# Altium PCB UDEMY_ALI_ALCAN.PcbDoc (part 2 of 3)
Units mm, origin at the board's own origin, x right, y up, seen from the top; angles counter-clockwise.
Board outline 102 x 100 mm, 4 copper layers (Top Layer, GROUND, POWER, Bottom Layer), stack 1.369 mm thick; 127 components, 90 nets, 438 pads, 96 vias.
Unrouted connection lines stored in the file: 1.
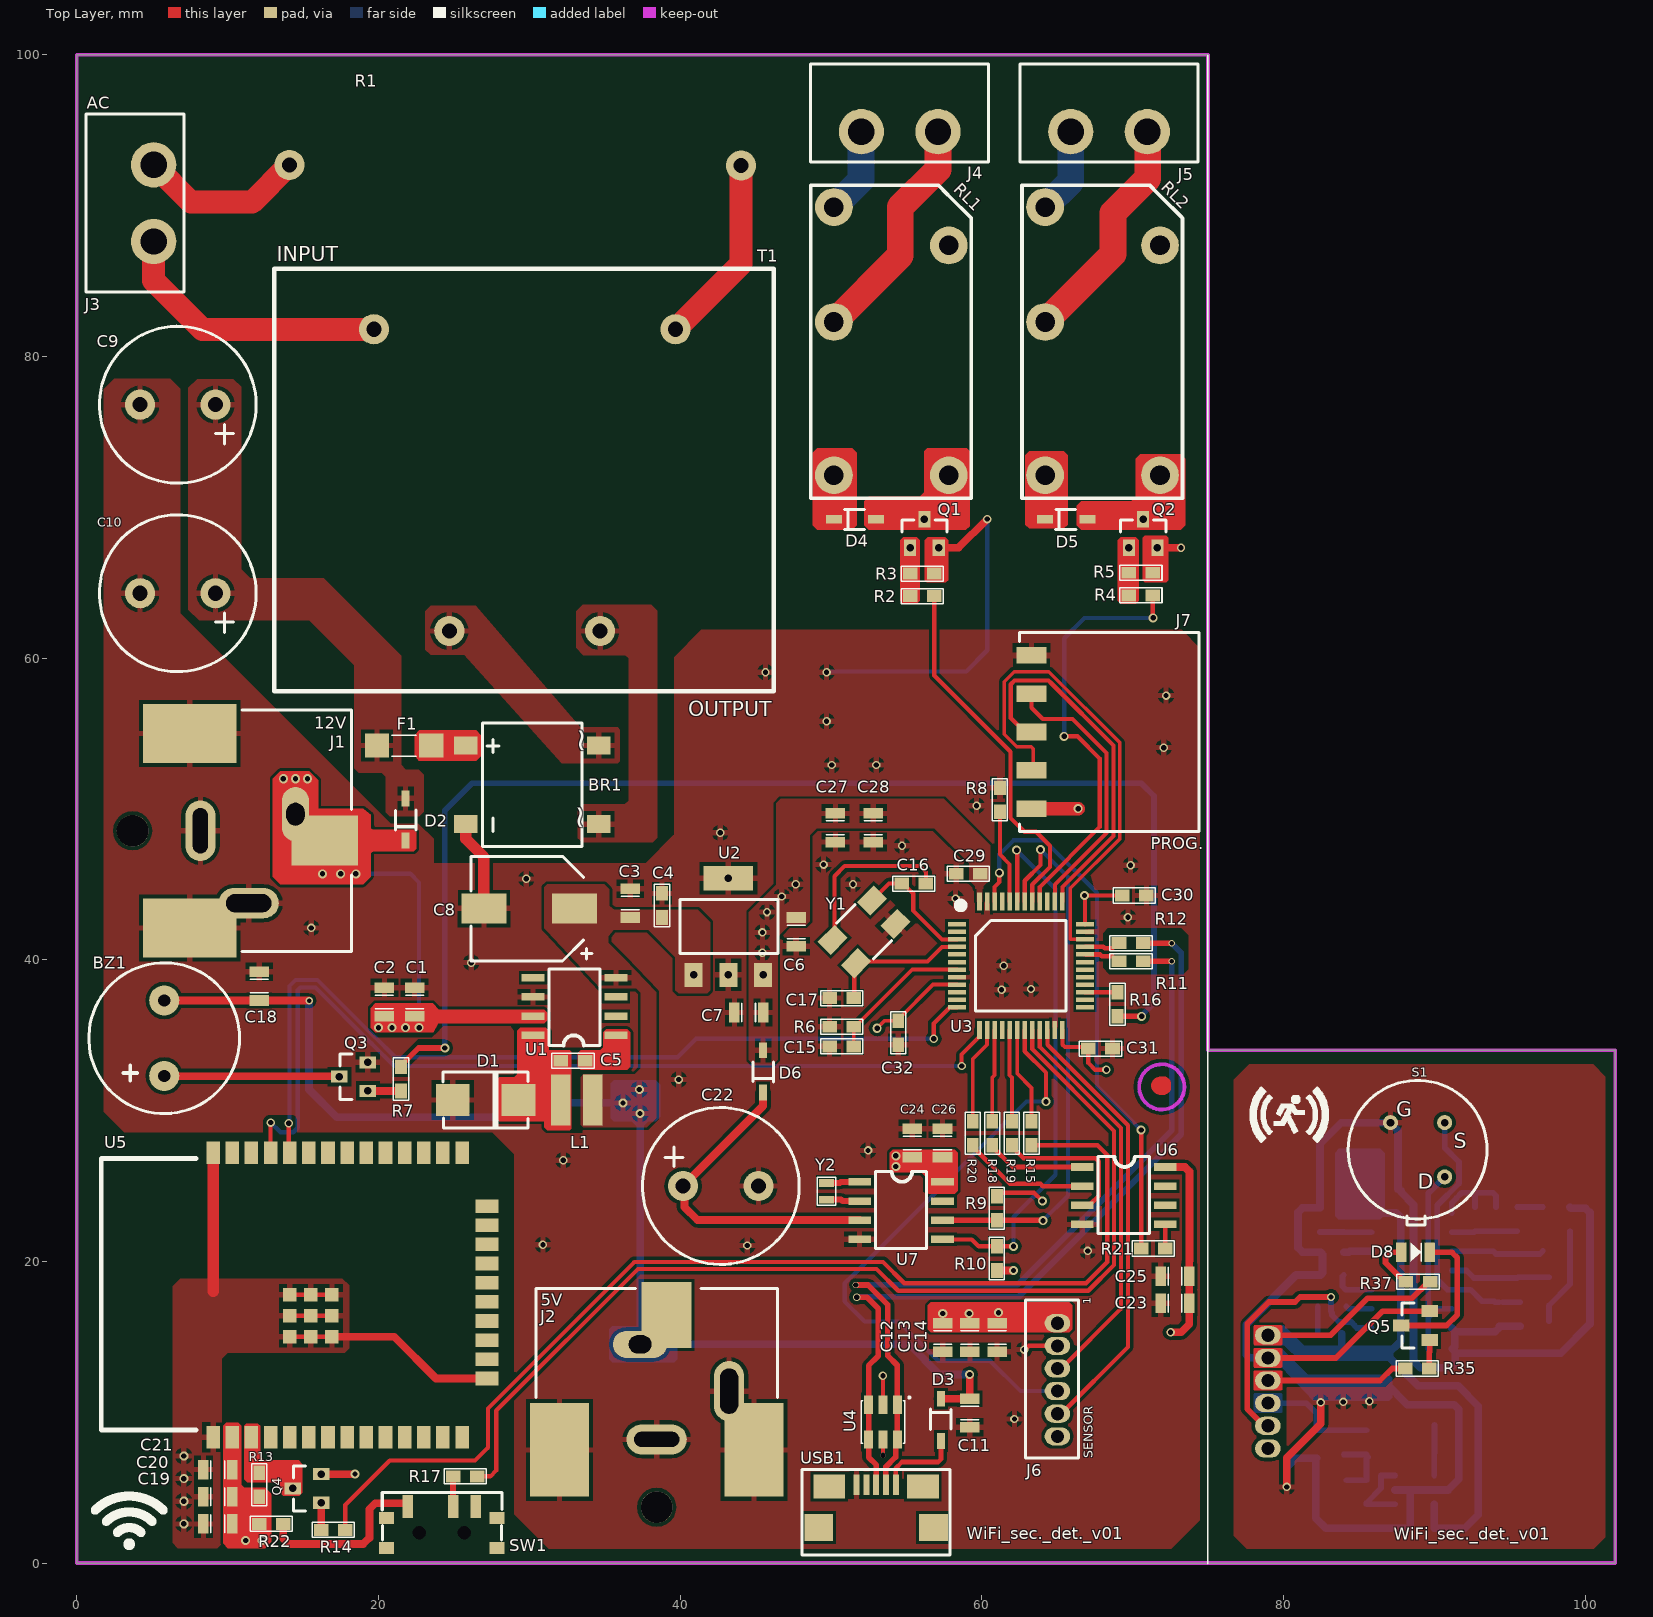
[diagram p0: Top Layer view]

## Part data (continued)
R6 R7 R8 R11 R12 R14 R15 R16 R17 R18 R19 R20 R21 R22 R37: library part "RES 100 OHM 0603", "Res Thick Film 0603 100 Ohm 5% 1/10W ±100ppm/°C Molded SMD SMD Paper T/R", Case Code (Metric)=1608, Case Code (Imperial)=0603, Manufacturer=Yageo, Max Operating Temperature=155°C, Max Power Dissipation=100mW, Min Operating Temperature=-55°C, Resistance Tolerance=5%, Resistor Type="Thick Film", Supplier Part Number=311-100GRCT-ND, Temperature Coefficient=100ppm/°C, Voltage Rating=50V, Case/Package=0603, Category="Chip SMD Resistors", ComponentLink1Description=https://datasheet.ciiva.com/7746/443971-7746425.pdf?src-supplier=Element14, ComponentLink1URL=https://datasheet.ciiva.com/7746/443971-7746425.pdf?src-supplier=Element14, ComponentLink2Description=https://datasheet.ciiva.com/7746/443971-7746426.pdf?src-supplier=Element14, ComponentLink2URL=https://datasheet.ciiva.com/7746/443971-7746426.pdf?src-supplier=Element14, ComponentLink3Description=https://datasheet.ciiva.com/8883/pyu-rc0603-51-rohs-l-4-8883047.pdf?src-supplier=Avnet, ComponentLink3URL=https://datasheet.ciiva.com/8883/pyu-rc0603-51-rohs-l-4-8883047.pdf?src-supplier=Avnet, ComponentLink4Description=https://datasheet.ciiva.com/15189/getdatasheetpartid-325207-15189846.pdf?src-supplier=Verical, ComponentLink4URL=https://datasheet.ciiva.com/15189/getdatasheetpartid-325207-15189846.pdf?src-supplier=Verical, Construction=Rectangular, Contact Plating=Tin,Matte, Depth=0.8mm, Designed By=ALİ, Features="Moisture Resistant", Lead Free="Lead Free", Length=1.6mm, Manufacturer Part Number=RC0603JR-07100RL, Military Standard=Not, Number of Terminations=2, Packaging="Tape and Reel", Pins=2, Power Rating=100mW, Pricing="1=0,1, 10=0,014, 50=0,0088, 100=0,0073, 500=0,00486, 1000=0,00415 (USD)", Reach SVHC Compliant=Unknown, RoHS=Yes, RoHS Compliant=Yes, Series=RC, Stock=872002, Supplier=Digi-Key, Termination=SMD/SMT, Tolerance=5%, Voltage Rating (DC)=50V, Width=0.8mm
R9 R10: library part "RES 4K7 OHM 0603", "SMD Chip Resistor, 4.7 kOhm, ± 5%, 100 mW, 0603 [1608 Metric], Thick Film, General Purpose", Case Code (Metric)=1608, Case Code (Imperial)=0603, Manufacturer=Yageo, Max Operating Temperature=155°C, Max Power Dissipation=100mW, Min Operating Temperature=-55°C, Resistance Tolerance=5%, Resistor Type="Thick Film", Supplier Part Number=311-4.7KGRCT-ND, Temperature Coefficient=100ppm/°C, Voltage Rating=50V, Case/Package=0603, Category="Chip SMD Resistors", ComponentLink1Description=https://datasheet.ciiva.com/46412/443971-46412858.pdf?src-supplier=Element14, ComponentLink1URL=https://datasheet.ciiva.com/46412/443971-46412858.pdf?src-supplier=Element14, Construction=Rectangular, Depth=0.8mm, Designed By=ALİ, Features="Moisture Resistant", Lead Free="Lead Free", Length=1.6mm, Manufacturer Part Number=RC0603JR-074K7L, Military Standard=Not, Number of Terminations=2, Packaging="Tape and Reel", Pins=2, Power Rating=100mW, Pricing="1=0,1, 10=0,014, 50=0,0088, 100=0,0073, 500=0,00486, 1000=0,00415 (USD)", Reach SVHC Compliant=No, RoHS=Yes, RoHS Compliant=Yes, Series=RC, Stock=7008256, Supplier=Digi-Key, Termination=SMD/SMT, Tolerance=5%, Voltage Rating (AC)=50V, Voltage Rating (DC)=50V, Width=0.8mm
R23 R27: library part "RES 560K OHM 0603", "SMD Chip Resistor, 560 kOhm, ± 5%, 100 mW, 0603 [1608 Metric], Thick Film, General Purpose", Case Code (Metric)=1608, Case Code (Imperial)=0603, Manufacturer=Yageo, Max Operating Temperature=155°C, Max Power Dissipation=100mW, Min Operating Temperature=-55°C, Package Quantity=1, Resistance Tolerance=5%, Resistor Type="Thick Film", Supplier Part Number=311-560KGRCT-ND, Temperature Coefficient=100ppm/°C, Voltage Rating=75V, Voltage Rating (AC)=50V, Case/Package=0603, Category="Chip SMD Resistors", ComponentLink1Description=https://datasheet.ciiva.com/2453/pyu-r-int-thick-7-2453056.pdf?src-supplier=Digi-Key, ComponentLink1URL=https://datasheet.ciiva.com/2453/pyu-r-int-thick-7-2453056.pdf?src-supplier=Digi-Key, ComponentLink2Description=https://datasheet.ciiva.com/2453/pyu-r-int-thick-7-2453057.pdf?src-supplier=Digi-Key, ComponentLink2URL=https://datasheet.ciiva.com/2453/pyu-r-int-thick-7-2453057.pdf?src-supplier=Digi-Key, ComponentLink3Description=https://datasheet.ciiva.com/2453/pyu-r-int-thick-7-2453055.pdf?src-supplier=Digi-Key, ComponentLink3URL=https://datasheet.ciiva.com/2453/pyu-r-int-thick-7-2453055.pdf?src-supplier=Digi-Key, Designed By=ALİ, Features="Moisture Resistant", Height=0.022inch, Lead Free="Lead Free", Length=0.063inch, Manufacturer Part Number=RC0603JR-07560KL, Number of Terminations=2, Packaging="Tape and Reel", Pins=2, Power Rating=100mW, Pricing="1=0,1, 10=0,014, 50=0,0088, 100=0,0073, 500=0,00486, 1000=0,00415 (USD)", Reach SVHC Compliant=Unknown, RoHS=Yes, RoHS Compliant=Yes, Series=RC, Stock=501281, Supplier=Digi-Key, Technology="THICK FILM", Termination=SMD/SMT, Tolerance=5%, Voltage Rating (DC)=50V, Weight=7.1E-05oz, Width=0.8mm, Working Voltage=75V
R29: library part "RES 43K OHM 0603", "Res Thick Film 0603 43K Ohm 5% 0.1W(1/10W) ±100ppm/°C Pad SMD T/R", Manufacturer=Yageo, Supplier Part Number=311-43KGRCT-ND, Category="Chip SMD Resistors", ComponentLink1Description=https://datasheet.ciiva.com/2453/pyu-r-int-thick-7-2453052.pdf?src-supplier=Digi-Key, ComponentLink1URL=https://datasheet.ciiva.com/2453/pyu-r-int-thick-7-2453052.pdf?src-supplier=Digi-Key, ComponentLink2Description=https://datasheet.ciiva.com/2453/pyu-r-int-thick-7-2453053.pdf?src-supplier=Digi-Key, ComponentLink2URL=https://datasheet.ciiva.com/2453/pyu-r-int-thick-7-2453053.pdf?src-supplier=Digi-Key, ComponentLink3Description=https://datasheet.ciiva.com/2453/pyu-r-int-thick-7-2453054.pdf?src-supplier=Digi-Key, ComponentLink3URL=https://datasheet.ciiva.com/2453/pyu-r-int-thick-7-2453054.pdf?src-supplier=Digi-Key, Designed By=ALİ, Manufacturer Part Number=RC0603JR-0743KL, Pricing="1=0,1, 10=0,014, 50=0,0088, 100=0,0073, 500=0,00486, 1000=0,00415 (USD)", RoHS=Yes, Stock=290453, Supplier=Digi-Key
R30 R31 R36: library part "RES 220K OHM 0603", "SMD Chip Resistor, 220 kOhm, ± 5%, 100 mW, 0603 [1608 Metric], Thick Film, General Purpose", Manufacturer=Yageo, Supplier Part Number=311-220KGRCT-ND, Voltage Rating (AC)=50V, Category="Chip SMD Resistors", ComponentLink1Description=https://datasheet.ciiva.com/2452/pyu-r-int-thick-7-2452923.pdf?src-supplier=Digi-Key, ComponentLink1URL=https://datasheet.ciiva.com/2452/pyu-r-int-thick-7-2452923.pdf?src-supplier=Digi-Key, ComponentLink2Description=https://datasheet.ciiva.com/2452/pyu-r-int-thick-7-2452924.pdf?src-supplier=Digi-Key, ComponentLink2URL=https://datasheet.ciiva.com/2452/pyu-r-int-thick-7-2452924.pdf?src-supplier=Digi-Key, ComponentLink3Description=https://datasheet.ciiva.com/2452/pyu-r-int-thick-7-2452925.pdf?src-supplier=Digi-Key, ComponentLink3URL=https://datasheet.ciiva.com/2452/pyu-r-int-thick-7-2452925.pdf?src-supplier=Digi-Key, Manufacturer Part Number=RC0603JR-07220KL, Pricing="1=0,1, 10=0,014, 50=0,0088, 100=0,0073, 500=0,00486, 1000=0,00415 (USD)", RoHS=Yes, Stock=938120, Supplier=Digi-Key
R32 R33: library part "RES 0 OHM 0603", "Zero Ohm Resistor, Jumper, 0603 [1608 Metric], Thick Film, 100 mW, 1 A, Surface Mount", Case Code (Metric)=1608, Case Code (Imperial)=0603, Manufacturer=Yageo, Max Operating Temperature=155°C, Max Power Dissipation=100mW, Min Operating Temperature=-55°C, Package Quantity=5000, Resistance=0R, Resistance Tolerance=5%, Resistor Type="Thick Film", Supplier Part Number=311-0.0GRCT-ND, Temperature Coefficient=200ppm/°C, Tolerance=1%, Voltage Rating=50V, Case/Package=0603, Category="Chip SMD Resistors", Construction=Rectangular, Contact Plating=Tin,Matte, Depth=0.8mm, Designed By=ALİ, Features="Moisture Resistant", Height=0.45mm, Lead Free="Lead Free", Length=1.6mm, Manufacturer Part Number=RC0603JR-070RL, Military Standard=Not, Number of Terminations=2, Packaging="Tape and Reel", Pins=2, Power Rating=100mW, Pricing="1=0,1, 10=0,016, 25=0,0112, 50=0,0086, 100=0,0063, 250=0,0048, 500=0,00386, 1000=0,00284 (USD)", Reach SVHC Compliant=Unknown, RoHS=Yes, RoHS Compliant=Yes, Series=RC, Stock=5412959, Supplier=Digi-Key, Technology="THICK FILM", Termination=SMD/SMT, Voltage Rating (DC)=50V, Width=0.8mm
RL1 RL2: "General Purpose Relay SPDT (1 Form C) 12VDC Coil Through Hole", Manufacturer=Panasonic, Supplier Part Number=255-3562-ND, Case/Package=ALQ112, Category="Power Relays", ComponentLink1Description=https://datasheet.ciiva.com/24388/307ds-61b20-en-lq-24388909.pdf?src-supplier=Onlinecomponents.com, ComponentLink1URL=https://datasheet.ciiva.com/24388/307ds-61b20-en-lq-24388909.pdf?src-supplier=Onlinecomponents.com, Designed By=ALİ, Manufacturer Part Number=ALQ112, Pricing="1=1,31, 10=1,228, 25=1,092, 50=1,0372, 100=0,9826, 250=0,87344, 500=0,81884, 1000=0,76426, 5000=0,73696 (USD)", RoHS=Yes, Stock=251, Supplier=Digi-Key
RT1: "Thermistor PTC 10K Ohm 1% 1206", Case Code (Imperial)=1206, Manufacturer="Vishay Dale", Max Operating Temperature=125°C, Max Power Dissipation=125mW, Min Operating Temperature=-55°C, Package Quantity=5000, Resistance Tolerance=1%, Supplier Part Number=541-3533-1-ND, Voltage=40V, Case/Package=1206, Category=Thermistors, ComponentLink1Description=https://datasheet.ciiva.com/2852/tfpt-2852076.pdf?src-supplier=Digi-Key, ComponentLink1URL=https://datasheet.ciiva.com/2852/tfpt-2852076.pdf?src-supplier=Digi-Key, Designed By=ALİ, Height=0.55mm, Lead Free="Lead Free", Length=3.2mm, Manufacturer Part Number=TFPT1206L1002FM, Mounting Technology="Surface Mount", Packaging="Tape and Reel", Power Rating=125mW, Pricing="1=1,3, 10=0,973, 25=0,778, 100=0,7133, 500=0,59978, 1000=0,53495 (USD)", RoHS=Yes, RoHS Compliant=Yes, Series=TFPT, Stock=168, Supplier=Digi-Key, Termination=SMD/SMT, Tolerance=1%, Width=1.6mm
S1: "SENSOR PYRO DETECTOR DUAL MOTION", Case/Package=LHI, Max Supply Voltage=12, Min Supply Voltage=2, Supplier Part Number=1601-LHI878/3902-ND, Designed By=ALİ, Supplier 1=Digi-Key, Type="Pyro Detector"
SW1: "Slide Switch, SPDT, 0.025A, 24V, SMD", Manufacturer=E-Switch, Max Operating Temperature=70°C, Min Operating Temperature=-20°C, Operating Force=150gf, Supplier Part Number=EG5720CT-ND, Voltage Rating (DC)=24V, Actuator Length=1.4mm, Actuator Type=Standard, ComponentLink1Description=https://media.digikey.com/pdf/Data%20Sheets/E-Switch%20PDFs/EG1215_Series_Ds.pdf?src-supplier=Digi-Key, ComponentLink1URL=https://media.digikey.com/pdf/Data%20Sheets/E-Switch%20PDFs/EG1215_Series_Ds.pdf?src-supplier=Digi-Key, ComponentLink2Description=http://www.farnell.com/datasheets/2645007.pdf?src-supplier=Farnell, ComponentLink2URL=http://www.farnell.com/datasheets/2645007.pdf?src-supplier=Farnell, Designed By=ALİ, Electrical Life=10000Cycles, Manufacturer Part Number=EG1215AA, Mechanical Life=10000Cycles, Mounting Technology="Surface Mount", Packaging="Cut Tape", Pricing="1=0,99, 10=0,951, 25=0,8884, 100=0,7715, 250=0,702, 500=0,6508, 1000=0,60327 (USD)", RoHS=Yes, RoHS Compliant=Yes, Series=EG, Stock=8007, Supplier=Digi-Key, Switch Function=On-On, Switch Travel=1.5mm, Termination="Gull Wing", Throw Configuration=SPDT
T1: "230-12 Transformer 1VA", Manufacturer="Zettler Magnetics", Operating Frequency=50-60Hz, Primary Voltage=230V, Rated Power=1VA, Secondary Voltage=12V, Supplier Part Number=2469-BV302S12010-ZU, Designed By=ALİ, Manufacturer Part Number=BV302S12010-ZU, RoHS=No, Supplier 1=Digi-Key
U1: "SIMPLE SWITCHER® 6.5V to 40V, 1A Low Component Count Step-Down Regulator 8-SOIC -40 to 125", Case/Package="SOIC N", Manufacturer="TI National Semiconductor", Max Operating Temperature=125°C, Max Output current=1A, Max Supply Voltage=40V, Min Operating Temperature=-40°C, Min Input Voltage=8V, Output Voltage=12V, Package Quantity=2500, Quiescent Current=2.5mA, Supplier Part Number=296-35410-1-ND, Switching Frequency=260kHz, Category="Voltage Regulators - Switching", ComponentLink1Description=https://datasheet.ciiva.com/41457/001013881-da-01-en-ic-reg-buck-lm2675mx-12-nopb-soic-8-tid-41457896.pdf?src-supplier=Conrad, ComponentLink1URL=https://datasheet.ciiva.com/41457/001013881-da-01-en-ic-reg-buck-lm2675mx-12-nopb-soic-8-tid-41457896.pdf?src-supplier=Conrad, ComponentLink2Description=https://datasheet.ciiva.com/3220/lm2675-3220840.pdf?src-supplier=Avnet, ComponentLink2URL=https://datasheet.ciiva.com/3220/lm2675-3220840.pdf?src-supplier=Avnet, Designed By=ALİ, Efficiency=94%, Lead Free="Lead Free", Manufacturer Part Number=LM2675MX-12/NOPB, Mounting Technology="Surface Mount", Number of Outputs=1, Operating Supply Voltage=40V, Output Current=1A, Output Type=Fixed, Packaging="Tape and Reel", Pins=8, Pricing="1=4,71, 10=4,231, 25=3,9996, 100=3,4663, 250=3,28856, 500=2,95082, 1000=2,48864 (USD)", Radiation Hardening=No, RoHS=Yes, RoHS Compliant=Yes, Series=LM2675, Supplier=Digi-Key
U2: "AP7361 Series 3.3 V 1 A Low SMT Dropout Fixed-Mode Regulator - SOT-223", Case/Package=SOT-223, Dropout Voltage=500mV, Manufacturer=Diodes, Max Operating Temperature=85°C, Max Output current=1A, Max Power Dissipation=1.1W, Max Supply Voltage=6V, Min Current Limit=1.1A, Min Operating Temperature=-40°C, Min Input Voltage=2.2V, Output Voltage=3.3V, Package Quantity=1, Power Dissipation=1.1kW, Power Supply Rejection Ratio (PSRR)=65dB, Quiescent Current=70uA, Reference Voltage=800mV, Supplier Part Number=AP7361-33E-13DICT-ND, Accuracy=1%, Category="Voltage Regulators - Linear", ComponentLink1Description=https://datasheet.ciiva.com/26926/getdatasheetpartid-670786-26926141.pdf?src-supplier=Verical, ComponentLink1URL=https://datasheet.ciiva.com/26926/getdatasheetpartid-670786-26926141.pdf?src-supplier=Verical, ComponentLink2Description=https://datasheet.ciiva.com/25651/ap7361-25651049.pdf?src-supplier=Digi-Key, ComponentLink2URL=https://datasheet.ciiva.com/25651/ap7361-25651049.pdf?src-supplier=Digi-Key, Contact Plating=Tin,Matte, Designed By=ALİ, Lead Free="Lead Free", Manufacturer Part Number=AP7361-33E-13, Mounting Technology="Surface Mount", Number of Outputs=1, Number of Regulators=1, Output Current=1A, Output Type=Fixed, Packaging="Tape and Reel", Pins=4, Polarity=Positive, Pricing="1=0,51, 10=0,414, 25=0,3788, 100=0,2818, 250=0,2554, 500=0,21138, 1000=0,15853 (USD)", Radiation Hardening=No, Reach SVHC Compliant=Yes, RoHS=Yes, RoHS Compliant=Yes, Series=-, Stock=144913, Supplier=Digi-Key, Weight=0.000282oz
U3: "MCU 32-bit STM32F ARM Cortex M3 RISC 32KB Flash 2.5V/3.3V 48-Pin LQFP Tray", Case/Package=LQFP, Clock Frequency=72MHz, Manufacturer=STMicroelectronics, Max Operating Temperature=85°C, Max Supply Voltage=3.6V, Min Operating Temperature=-40°C, Min Supply Voltage=2V, Package Quantity=1500, Supplier Part Number=497-11515-ND, Category=Microcontrollers, ComponentLink1Description=https://datasheet.ciiva.com/15122/getdatasheetpartid-69879-15122075.pdf?src-supplier=Verical, ComponentLink1URL=https://datasheet.ciiva.com/15122/getdatasheetpartid-69879-15122075.pdf?src-supplier=Verical, ComponentLink2Description=https://datasheet.ciiva.com/14100/pustm-arm-microcont-stm32f103-en-14100507.pdf?src-supplier=Distrelec, ComponentLink2URL=https://datasheet.ciiva.com/14100/pustm-arm-microcont-stm32f103-en-14100507.pdf?src-supplier=Distrelec, Core Architecture=ARM, Data Bus Width=32b, Designed By=ALİ, Height=1.4mm, Lead Free="Lead Free", Length=7mm, Manufacturer Part Number=STM32F103C6T6A, Memory Format=FLASH, Memory Size=32KB, Number of ADC Channels=10, Number of Timers/Counters=3, Number of I/Os=37, Packaging=Tray, Pins=48, Pricing="1=6,31, 10=5,669, 25=5,3592, 80=4,64475, 250=4,40656, 500=3,954, 1000=3,40275 (USD)", RAM Size=10KB, RoHS=Yes, RoHS Compliant=Yes, Series=STM32F103C6, SleepMode=OK, Stock=212, Supplier=Digi-Key, Weight=0.006409oz, Width=7mm, Interface=I2C,SPI,USART
U4: library part "USB PROTECTION", "USBLC6 Series 2 Line 6 V Uni / Bi-Directional ESD Protection - SOT-23-6", Breakdown Voltage=6V, Case/Package=SOT-23, Clamping Voltage=17V, Leakage Current=150nA, Manufacturer=STMicroelectronics, Max Operating Temperature=125°C, Min Operating Temperature=-40°C, Operating Supply Voltage=1.1V, Package Quantity=3000, Peak Pulse Current=5A, Power Line Protection=Yes, Reverse Standoff Voltage=5.25V, Supplier Part Number=497-5235-6-ND, Test Current=1mA, Working Voltage=5V, Category="TVS Diodes", Clamping Voltage-Max=17V, ComponentLink1Description=https://datasheet.ciiva.com/1268/1690354-1268384.pdf?src-supplier=Element14, ComponentLink1URL=https://datasheet.ciiva.com/1268/1690354-1268384.pdf?src-supplier=Element14, ComponentLink2Description=https://datasheet.ciiva.com/4508/cd00050750-113117-4508433.pdf?src-supplier=Mouser, ComponentLink2URL=https://datasheet.ciiva.com/4508/cd00050750-113117-4508433.pdf?src-supplier=Mouser, ComponentLink3Description=https://datasheet.ciiva.com/15143/getdatasheetpartid-148465-15143789.pdf?src-supplier=Verical, ComponentLink3URL=https://datasheet.ciiva.com/15143/getdatasheetpartid-148465-15143789.pdf?src-supplier=Verical, ComponentLink4Description=https://datasheet.ciiva.com/16200/cd00050750-16200026.pdf?src-supplier=Future+Electronics, ComponentLink4URL=https://datasheet.ciiva.com/16200/cd00050750-16200026.pdf?src-supplier=Future+Electronics, ComponentLink5Description=https://datasheet.ciiva.com/41444/001184109-da-01-en-ic-esd-protecti-usblc6-2sc6-sot-23-6-stm-41444156.pdf?src-supplier=Conrad, ComponentLink5URL=https://datasheet.ciiva.com/41444/001184109-da-01-en-ic-esd-protecti-usblc6-2sc6-sot-23-6-stm-41444156.pdf?src-supplier=Conrad, Data Rate=480Mbps, Depth=1.75mm, Designed By=ALİ, Direction=Unidirectional,Bidirectional, ESD Protection=Yes, Height=1.3mm, Lead Free="Lead Free", Length=3.05mm, Manufacturer Part Number=USBLC6-2SC6, Max Breakdown Voltage=6V, Max Reverse Leakage Current=150nA, Min Breakdown Voltage=6V, Mounting Technology="Surface Mount", Number of Bidirectional Channels=2, Number of Channels=2, Number of Elements=1, Packaging="Tape and Reel", Pins=6, Polarity=Unidirectional,Bidirectional, Pricing="1=0,61, 10=0,522, 100=0,3897, 500=0,3062, 1000=0,2366 (USD)", Radiation Hardening=No, Reach SVHC Compliant=No, Reverse Breakdown Voltage=6V, RoHS=Yes, RoHS Compliant=Yes, Series=USB, Stock=113981, Supplier=Digi-Key, Termination=SMD/SMT, Width=1.75mm
U5: Case/Package=ESP32-32, Frequency=2.5GHz, Manufacturer="Espressif Systems", Max Operating Temperature=+85, Min Operating Temperature=-40, Supply Voltage-Nom=3V3, Data Rate=150Mbps, Designed By=ALİ, Manufacturer Part Number=ESP32-WROOM-32, Packaging="Cut Tape", RoHS=No, Supplier=Digi-Key
U6: "Temp Sensor Digital Serial (3-Wire, SPI) 8-Pin SOIC N Tube", Manufacturer=Maxim, Supplier Part Number=MAX6662MSA+-ND, Category="Temperature and Humidity Sensors", ComponentLink1Description=https://datasheet.ciiva.com/5299/max6662-89142-5299456.pdf?src-supplier=Mouser, ComponentLink1URL=https://datasheet.ciiva.com/5299/max6662-89142-5299456.pdf?src-supplier=Mouser, ComponentLink2Description=https://datasheet.ciiva.com/3277/max6662-3277979.pdf?src-supplier=Avnet, ComponentLink2URL=https://datasheet.ciiva.com/3277/max6662-3277979.pdf?src-supplier=Avnet, ComponentLink3Description=https://datasheet.ciiva.com/2003/max6662-2003390.pdf?src-supplier=Digi-Key, ComponentLink3URL=https://datasheet.ciiva.com/2003/max6662-2003390.pdf?src-supplier=Digi-Key, Designed By=ALİ, Manufacturer Part Number=MAX6662MSA+, Pricing="1=4,61, 10=3,454, 25=3,0704, 50=2,9168, 100=2,8401, 500=2,37956, 1000=2,22604 (USD)", RoHS=Yes, Stock=593, Supplier=Digi-Key
U7: "Real-time Clocks Clock/Calendar I2C, 2-Wire Serial 70uA @ 2V ~ 5.5V SOIC-8_150mil RoHS", Case/Package=SOIC, Manufacturer=STMicroelectronics, Supplier Part Number=497-4697-1-ND, Category="Real Time Clocks", ComponentLink1Description=https://datasheet.ciiva.com/7630/1837112-7630077.pdf?src-supplier=Element14, ComponentLink1URL=https://datasheet.ciiva.com/7630/1837112-7630077.pdf?src-supplier=Element14, ComponentLink2Description=https://datasheet.ciiva.com/16213/cd00001542-16213654.pdf?src-supplier=Future+Electronics, ComponentLink2URL=https://datasheet.ciiva.com/16213/cd00001542-16213654.pdf?src-supplier=Future+Electronics, ComponentLink3Description=https://datasheet.ciiva.com/41459/001185345-da-01-en-ic-rtc-srl-512kbit-m41t00m6f-soic-8-stm-41459818.pdf?src-supplier=Conrad, ComponentLink3URL=https://datasheet.ciiva.com/41459/001185345-da-01-en-ic-rtc-srl-512kbit-m41t00m6f-soic-8-stm-41459818.pdf?src-supplier=Conrad, Designed By=ALİ, Manufacturer Part Number=M41T00M6F, Pricing="1=3,96, 10=3,556, 25=3,3616, 100=2,9134, 250=2,76404, 500=2,48016, 1000=2,11425 (USD)", RoHS=Yes, Stock=5170, Supplier=Digi-Key
U8: library part OPA314, "OP AMP OPA314", Manufacturer="Texas Instruments", Supplier Part Number=296-36699-1-ND, Category="Amplifiers - Op Amps, Buffer, Instrumentation", ComponentLink1Description=https://datasheet.ciiva.com/29638/opa314-29638827.pdf?src-supplier=Digi-Key, ComponentLink1URL=https://datasheet.ciiva.com/29638/opa314-29638827.pdf?src-supplier=Digi-Key, ComponentLink2Description=https://datasheet.ciiva.com/14462/opa2314-14462006.pdf?src-supplier=Avnet, ComponentLink2URL=https://datasheet.ciiva.com/14462/opa2314-14462006.pdf?src-supplier=Avnet, ComponentLink3Description=https://datasheet.ciiva.com/14456/opa2314-14456281.pdf?src-supplier=Avnet, ComponentLink3URL=https://datasheet.ciiva.com/14456/opa2314-14456281.pdf?src-supplier=Avnet, Designed By=ALİ, Manufacturer Part Number=OPA314AIDBVR, Pricing="1=1,16, 10=1,034, 25=0,9812, 100=0,8061, 250=0,75352, 500=0,6659, 1000=0,5257 (USD)", RoHS=Yes, Stock=9278, Supplier=Digi-Key
U9: library part NCS36000, "PIR Controller NCS36000 Series Single 5.75V Passive Infrared Detector Controller (PIR) -SOIC-14", Manufacturer="ON Semiconductor", Supplier Part Number=NCS36000DRGOSCT-ND, Category="Amplifiers - Op Amps, Buffer, Instrumentation", ComponentLink1Description=https://datasheet.ciiva.com/1781/ncs36000-d-1781637.pdf?src-supplier=Digi-Key, ComponentLink1URL=https://datasheet.ciiva.com/1781/ncs36000-d-1781637.pdf?src-supplier=Digi-Key, ComponentLink2Description=https://datasheet.ciiva.com/4763/ncs36000-d-89569-4763639.pdf?src-supplier=Mouser, ComponentLink2URL=https://datasheet.ciiva.com/4763/ncs36000-d-89569-4763639.pdf?src-supplier=Mouser, ComponentLink3Description=https://datasheet.ciiva.com/1781/ncs36000-d-1781638.pdf?src-supplier=Digi-Key, ComponentLink3URL=https://datasheet.ciiva.com/1781/ncs36000-d-1781638.pdf?src-supplier=Digi-Key, ComponentLink4Description=https://datasheet.ciiva.com/1781/ncs36000-d-1781639.pdf?src-supplier=Digi-Key, ComponentLink4URL=https://datasheet.ciiva.com/1781/ncs36000-d-1781639.pdf?src-supplier=Digi-Key, ComponentLink5Description=https://datasheet.ciiva.com/2965/ncs36000-d-2965212.pdf?src-supplier=Avnet, ComponentLink5URL=https://datasheet.ciiva.com/2965/ncs36000-d-2965212.pdf?src-supplier=Avnet, ComponentLink6Description=https://datasheet.ciiva.com/2966/ncs36000-d-2966525.pdf?src-supplier=Avnet, ComponentLink6URL=https://datasheet.ciiva.com/2966/ncs36000-d-2966525.pdf?src-supplier=Avnet, Designed By=ALİ, Manufacturer Part Number=NCS36000DRG, Pricing="1=1,1, 10=0,983, 25=0,9332, 100=0,7166, 250=0,63328, 500=0,59994, 1000=0,46662 (USD)", RoHS=Yes, Stock=18514, Supplier=Digi-Key
USB1: library part "Micro B  USB Connector", "CONN USB MICRO B RECPT SMT R/A", Color=Black, Current Rating=1.8A, Flammability Rating="UL94 V-0", Manufacturer="Amphenol ICC / FCI", Max Operating Temperature=85°C, Max Voltage Rating (AC)=100V, Min Operating Temperature=-55°C, Package Quantity=1400, Supplier Part Number=609-4613-1-ND, Insulation Resistance=1GR, Category=Uncategorized, ComponentLink1Description=http://uk.rs-online.com/webdocs/1450/0900766b814507ee.pdf?src-supplier=Rs, ComponentLink1URL=http://uk.rs-online.com/webdocs/1450/0900766b814507ee.pdf?src-supplier=Rs, ComponentLink2Description=https://cdn.amphenol-icc.com/media/wysiwyg/files/documentation/datasheet/inputoutput/io_usb_micro.pdf?src-supplier=Allied+Electronics, ComponentLink2URL=https://cdn.amphenol-icc.com/media/wysiwyg/files/documentation/datasheet/inputoutput/io_usb_micro.pdf?src-supplier=Allied+Electronics, ComponentLink3Description=https://cdn.amphenol-icc.com/media/wysiwyg/files/documentation/datasheet/inputoutput/io_usb_micro.pdf?src-supplier=Mouser, ComponentLink3URL=https://cdn.amphenol-icc.com/media/wysiwyg/files/documentation/datasheet/inputoutput/io_usb_micro.pdf?src-supplier=Mouser, ComponentLink4Description=http://www.farnell.com/datasheets/2366786.pdf?src-supplier=Newark, ComponentLink4URL=http://www.farnell.com/datasheets/2366786.pdf?src-supplier=Newark, ComponentLink5Description=http://www.amphenol-icc.com/media/wysiwyg/files/drawing/10118192.pdf?src-supplier=Digi-Key, ComponentLink5URL=http://www.amphenol-icc.com/media/wysiwyg/files/drawing/10118192.pdf?src-supplier=Digi-Key, ComponentLink6Description=https://cdn.amphenol-icc.com/media/wysiwyg/files/documentation/datasheet/inputoutput/io_usb_micro.pdf?src-supplier=Avnet, ComponentLink6URL=https://cdn.amphenol-icc.com/media/wysiwyg/files/documentation/datasheet/inputoutput/io_usb_micro.pdf?src-supplier=Avnet, ComponentLink7Description=https://cdn.amphenol-icc.com/media/wysiwyg/files/documentation/datasheet/inputoutput/io_usb_micro.pdf?src-supplier=Arrow+Electronics, ComponentLink7URL=https://cdn.amphenol-icc.com/media/wysiwyg/files/documentation/datasheet/inputoutput/io_usb_micro.pdf?src-supplier=Arrow+Electronics, ComponentLink8Description=https://cdn.amphenol-icc.com/media/wysiwyg/files/documentation/datasheet/inputoutput/io_usb_micro.pdf?src-supplier=Verical, ComponentLink8URL=https://cdn.amphenol-icc.com/media/wysiwyg/files/documentation/datasheet/inputoutput/io_usb_micro.pdf?src-supplier=Verical, ComponentLink9Description=https://datasheet.octopart.com/10118192-0001LF-Amphenol-Communications-Solutions-datasheet-96019471.pdf?src-supplier=Element14, ComponentLink9URL=https://datasheet.octopart.com/10118192-0001LF-Amphenol-Communications-Solutions-datasheet-96019471.pdf?src-supplier=Element14, ComponentLink10Description=http://www.farnell.com/cad/1935767.pdf?src-supplier=Element14, ComponentLink10URL=http://www.farnell.com/cad/1935767.pdf?src-supplier=Element14, ComponentLink11Description=http://www.farnell.com/datasheets/2366786.pdf?src-supplier=Farnell, ComponentLink11URL=http://www.farnell.com/datasheets/2366786.pdf?src-supplier=Farnell, ComponentLink12Description=https://cdn.amphenol-icc.com/media/wysiwyg/files/documentation/datasheet/inputoutput/io_usb_micro.pdf?src-supplier=NAC+Semi, ComponentLink12URL=https://cdn.amphenol-icc.com/media/wysiwyg/files/documentation/datasheet/inputoutput/io_usb_micro.pdf?src-supplier=NAC+Semi, ComponentLink13Description=https://datasheet.octopart.com/10118192-0001LF-Amphenol-Communications-Solutions-datasheet-55953129.pdf?src-supplier=Electro+Sonic, ComponentLink13URL=https://datasheet.octopart.com/10118192-0001LF-Amphenol-Communications-Solutions-datasheet-55953129.pdf?src-supplier=Electro+Sonic, ComponentLink14Description=https://cdn.amphenol-icc.com/media/wysiwyg/files/documentation/datasheet/inputoutput/io_usb_micro.pdf?src-supplier=Freelance+Electronics, ComponentLink14URL=https://cdn.amphenol-icc.com/media/wysiwyg/files/documentation/datasheet/inputoutput/io_usb_micro.pdf?src-supplier=Freelance+Electronics, ComponentLink15Description=https://cdn.amphenol-icc.com/media/wysiwyg/files/documentation/datasheet/inputoutput/io_usb_micro.pdf?src-supplier=TTI, ComponentLink15URL=https://cdn.amphenol-icc.com/media/wysiwyg/files/documentation/datasheet/inputoutput/io_usb_micro.pdf?src-supplier=TTI, ComponentLink16Description=https://cdn.amphenol-icc.com/media/wysiwyg/files/documentation/datasheet/inputoutput/io_usb_micro.pdf?src-supplier=Heilind+Electronics, ComponentLink16URL=https://cdn.amphenol-icc.com/media/wysiwyg/files/documentation/datasheet/inputoutput/io_usb_micro.pdf?src-supplier=Heilind+Electronics, ComponentLink17Description=https://cdn.amphenol-icc.com/media/wysiwyg/files/documentation/datasheet/inputoutput/io_usb_micro.pdf?src-supplier=TME, ComponentLink17URL=https://cdn.amphenol-icc.com/media/wysiwyg/files/documentation/datasheet/inputoutput/io_usb_micro.pdf?src-supplier=TME, ComponentLink18Description=https://cdn.amphenol-icc.com/media/wysiwyg/files/documentation/datasheet/inputoutput/io_usb_micro.pdf?src-supplier=SOS+electronic, ComponentLink18URL=https://cdn.amphenol-icc.com/media/wysiwyg/files/documentation/datasheet/inputoutput/io_usb_micro.pdf?src-supplier=SOS+electronic, Connector Type=USB,Receptacle, Contact Material="Copper Alloy", Contact Plating=Gold, Depth=5.57mm, Designed By=ALİ, Features=Shielded, Gender=Receptacle, Housing Material=Polymer, Length=7.86mm, Manufacturer Part Number=10118192-0001LF, Mounting Technology="Surface Mount,Horizontal", Number of Contacts=5, Number of Ports=1, Orientation="Right Angle", Packaging="Tape and Reel", Pins=5, Pitch=0.65mm, Pricing="1=0,46, 10=0,404, 25=0,3696, 50=0,3478, 100=0,3334, 250=0,30436, 500=0,28988 (USD)", Radiation Hardening=No, Reach SVHC Compliant=No, RoHS=No, Series=-, Stock=103749, Supplier=Digi-Key, Termination=Solder, USB Standard="USB 2.0", Voltage Rating=100V
Y1: library part CRYSTAL16MHz, "Crystal 16MHz ±30ppm (Tol) ±50ppm (Stability) 20pF FUND 50Ohm 4-Pin Mini-SMD T/R", Frequency=16MHz, Manufacturer="ECS International", Supplier Part Number=XC1120CT-ND, Category=Crystals, ComponentLink1Description=https://datasheet.ciiva.com/853/ecx-53b-853408.pdf?src-supplier=Digi-Key, ComponentLink1URL=https://datasheet.ciiva.com/853/ecx-53b-853408.pdf?src-supplier=Digi-Key, ComponentLink2Description=https://datasheet.ciiva.com/853/ecx-53b-853407.pdf?src-supplier=Digi-Key, ComponentLink2URL=https://datasheet.ciiva.com/853/ecx-53b-853407.pdf?src-supplier=Digi-Key, ComponentLink3Description=https://datasheet.ciiva.com/853/ecx-53b-853406.pdf?src-supplier=Digi-Key, ComponentLink3URL=https://datasheet.ciiva.com/853/ecx-53b-853406.pdf?src-supplier=Digi-Key, Designed By=ALİ, Manufacturer Part Number=ECS-160-20-30B-TR, Pricing="1=0,75, 10=0,628, 50=0,5648, 100=0,5021, 500=0,47702 (USD)", RoHS=Yes, Stock=27832, Supplier=Digi-Key
Y2: library part "CRYSTAL 32768kHz", "CRYSTAL 32.768kHz ±20ppm Crystal 12.5pF 90 kOhm -40°C ^ 85°C Surface Mount 2-SMD", Case/Package=CSMD, ESR (Equivalent Series Resistance)=90kR, Frequency=32.768kHz, Frequency Tolerance=20ppm, Load Capacitance=12.5pF, Manufacturer=Abracon, Max Operating Temperature=85°C, Min Operating Temperature=-40°C, Operating Frequency="32.768 kHz", Package Quantity=3000, Supplier Part Number=535-11899-1-ND, Category=Crystals, ComponentLink1Description=https://datasheet.ciiva.com/23810/abs05-23810480.pdf?src-supplier=Newark, ComponentLink1URL=https://datasheet.ciiva.com/23810/abs05-23810480.pdf?src-supplier=Newark, ComponentLink2Description=https://datasheet.ciiva.com/6728/abs05-6728949.pdf?src-supplier=Digi-Key, ComponentLink2URL=https://datasheet.ciiva.com/6728/abs05-6728949.pdf?src-supplier=Digi-Key, ComponentLink3Description=https://datasheet.ciiva.com/6728/abs05-6728950.pdf?src-supplier=Digi-Key, ComponentLink3URL=https://datasheet.ciiva.com/6728/abs05-6728950.pdf?src-supplier=Digi-Key, ComponentLink4Description=https://datasheet.ciiva.com/16411/abs05-16411149.pdf?src-supplier=Future+Electronics, ComponentLink4URL=https://datasheet.ciiva.com/16411/abs05-16411149.pdf?src-supplier=Future+Electronics, Depth=1mm, Designed By=ALİ, ESR=90kR, Height=0.5mm, Lead Free="Lead Free", Length=1.6mm, Manufacturer Part Number=ABS05-32.768KHZ-T, Mounting Technology="Surface Mount", Packaging="Tape and Reel", Pins=2, Pricing="1=0,72, 10=0,603, 50=0,5426, 100=0,4823, 500=0,4582, 1000=0,38586 (USD)", Radiation Hardening=No, Reach SVHC Compliant=No, RoHS=Yes, RoHS Compliant=Yes, Series=ABS05, Stock=306128, Supplier=Digi-Key, Termination=SMD/SMT, Tolerance=20ppm, Width=1mm

## Via types
v1: diameter 0.559, hole 0.35, Top Layer to Bottom Layer, 48 vias
v2: diameter 0.6, hole 0.35, Top Layer to Bottom Layer, 42 vias
v3: diameter 0.45, hole 0.3, Top Layer to Bottom Layer, 2 vias
v4: diameter 0.5, hole 0.35, Top Layer to Bottom Layer, 1 vias
v5: diameter 0.4, hole 0.35, Top Layer to Bottom Layer, 1 vias
v6: diameter 0.5, hole 0.3, Top Layer to Bottom Layer, tented both sides, 1 vias
v7: diameter 0.35, hole 0.35, Top Layer to Bottom Layer, 1 vias

## Nets (pads, with @x,y where several pads share a name; then routed paths per layer and width w, separated by ;. In a path a pad name is that pad's centre, name@x,y a point inside that pad or via, vN(x,y) a via of type N, cw(c..) or ccw(c..) an arc to the next point about the centre after c; other vN are vias at no path point)
"3V3 DC": C6.@47.7,42.8 C7.@45.5,36.5 C12.@57.416,15.904 C13.@59.216,15.904 C14.@61.016,15.904 C19.@10.3,2.6 C20.@10.3,4.4 C21.@10.3,6.2 C23.@73.762,17.222 C24.@55.4,26.9 C25.@73.762,19.022 C26.@57.4,26.9 C27.@50.3,49.7 C28.@52.8,49.7 C29.2 C30.2 C31.2 C32.2 D6.2 J6.1 J7.1 R9.2 R10.2 R13.2 R22.2 U2.3 U3.9 U3.24 U3.36 U3.48 U4.5 U5.2 U6.8 U7.8 | length 37.7
  Top Layer w0.254: v2(53.063,35.459) 53.563,35.959 C32.2@54.464,35.959 54.464,36.048 56.766,38.35 U3.9@58.35,38.35
  Top Layer w0.279: v7@53.445,7.154 v7(53.45,7.159) U4.5@53.45,8.2 ; R9.2@61,24.333 61.223,24.556 63.466,24.556 v2(64.016,24.006) ; U3.24@65.35,35.35 65.35,34.369 65.51,34.209 66.967,34.209 C31.2@67.067,34.109 67.067,33.158 67.517,32.708 v1(68.267,32.708) ; U3.36@66.85,42.35 66.85,44.228 v2(66.817,44.261) C30.2@69.318,44.261
  Top Layer w0.508: R10.2@61,19.4 v2(62.1,19.4) ; U6.8@72.167,26.261 73.471,26.261 73.769,25.964 73.769,20.06 73.762,20.053 C25.@73.762,19.022 C23.@73.762,17.554 ; v1(72.518,15.304) 73.218,15.304 73.762,15.847 C23.@73.762,17.222
  Top Layer w0.889: J7.1@63.3,50.02 v2(66.392,50.02)
  other v1: 45.461,40.46 45.461,41.811 45.762,43.161 46.743,44.192 47.662,45.011
  other v2: 11.2,1.5 12.3,1.5 57.414,16.554 59.165,16.554 61.115,16.604 54.3,26.3 54.3,27
"3V3 DC_S": C33.@82.218,13.85 C34.@84.219,13.9 C35.@86.219,13.9 C43.2 C46.2 C47.@85.7,26.6 J8.1 R34.2 R36.2 R37.2 RT1.2 U8.5 U9.14 | length 44.8
  Top Layer w0.381: J8.1@78.97,15.103 83.13,15.103 85.582,17.554 88.533,17.554 89.634,18.655 R37.2@89.723,18.655
  Bottom Layer w0.508: 83.871,14.254 83.871,14.429 ; 83.871,14.429 R34.2@83.871,15.204 ; U9.14@85.84,23.21 87.475,23.21 87.772,22.912 87.772,14.722 86.863,13.813 88.924,11.751 91.577,11.751 92.923,10.405 RT1.2@92.923,9.152 92.923,3.2 92.023,2.3 C43.2@90,2.3 U8.5@90,3.9 ; C35.@86.219,13.9 C35.@86.768,13.9
"5V DC": BZ1.2 C3.@36.7,42.8 C4.2 C8.1 C11.@59.2,10.9 C18.@12.1,37.3 D3.1 J2.1 L1.2 U1.4 U2.1 | length 78.9
  Top Layer w0.508: BZ1.2@5.8,37.3 15.388,37.3 v6(15.4,37.288) ; D3.1@57.3,10.9 C11.@59.2,10.9 v2(59.2,12.5)
  Bottom Layer w0.508: v6(15.4,37.288) 15.4,31.4 17.243,29.557 30.858,29.557 31.81,30.509 v2(36.21,30.509) ; v2(37.35,29.808) J2.1@37.35,14.5 55.2,14.5 57.2,12.5 v2(59.2,12.5)
  other v2: 37.3,31.4
"12V DC": C1.@22.4,36.25 C2.@20.4,36.25 D2.1 D4.1 D5.1 J1.1 RL1.5 RL2.5 U1.7 | length 14.1
  Bottom Layer w0.279: v2(18.5,45.7) 22.117,45.7 22.7,45.117 v2(22.7,35.5)
  other v2: 20,35.5 20.9,35.5 21.8,35.5 16.3,45.7 17.5,45.7 13.7,52 14.5,52 15.3,52
AC_LINE_1: J3.1 R1.1 | length 11.1
  Top Layer w1.524: J3.1@5.1,92.7 7.577,90.223 11.623,90.223 R1.1@14.1,92.7
AC_LINE_2: J3.2 T1.5 | length 18.5
  Top Layer w1.524: J3.2@5.1,87.62 5.1,85.023 8.323,81.8 T1.5@19.7,81.8
BUZZER: R7.1 R16.2 | length 83.8
  Top Layer w0.381: R7.1@21.5,32.9 21.5,32.989 22.667,34.155 v2(24.4,34.155) ; R16.2@69,36.25 v2(70.6,36.25)
  Bottom Layer w0.381: v2(24.4,34.155) 24.4,49.9 26.2,51.7 70.577,51.7 71.418,50.859 71.418,37.118 v2@70.6,36.3